# Altium PCB LV1.PCBDOC (part 1 of 2)
Units mm, origin at the board's own origin, x right, y up, seen from the top; angles counter-clockwise.
Board outline 220.06 x 100 mm, 4 copper layers (Component Side, Signal Layer 1, Signal Layer 2, Bottom Layer), stack 0.905 mm thick; 187 components, 117 nets, 633 pads, 195 vias.
Unrouted connection lines stored in the file: 13.
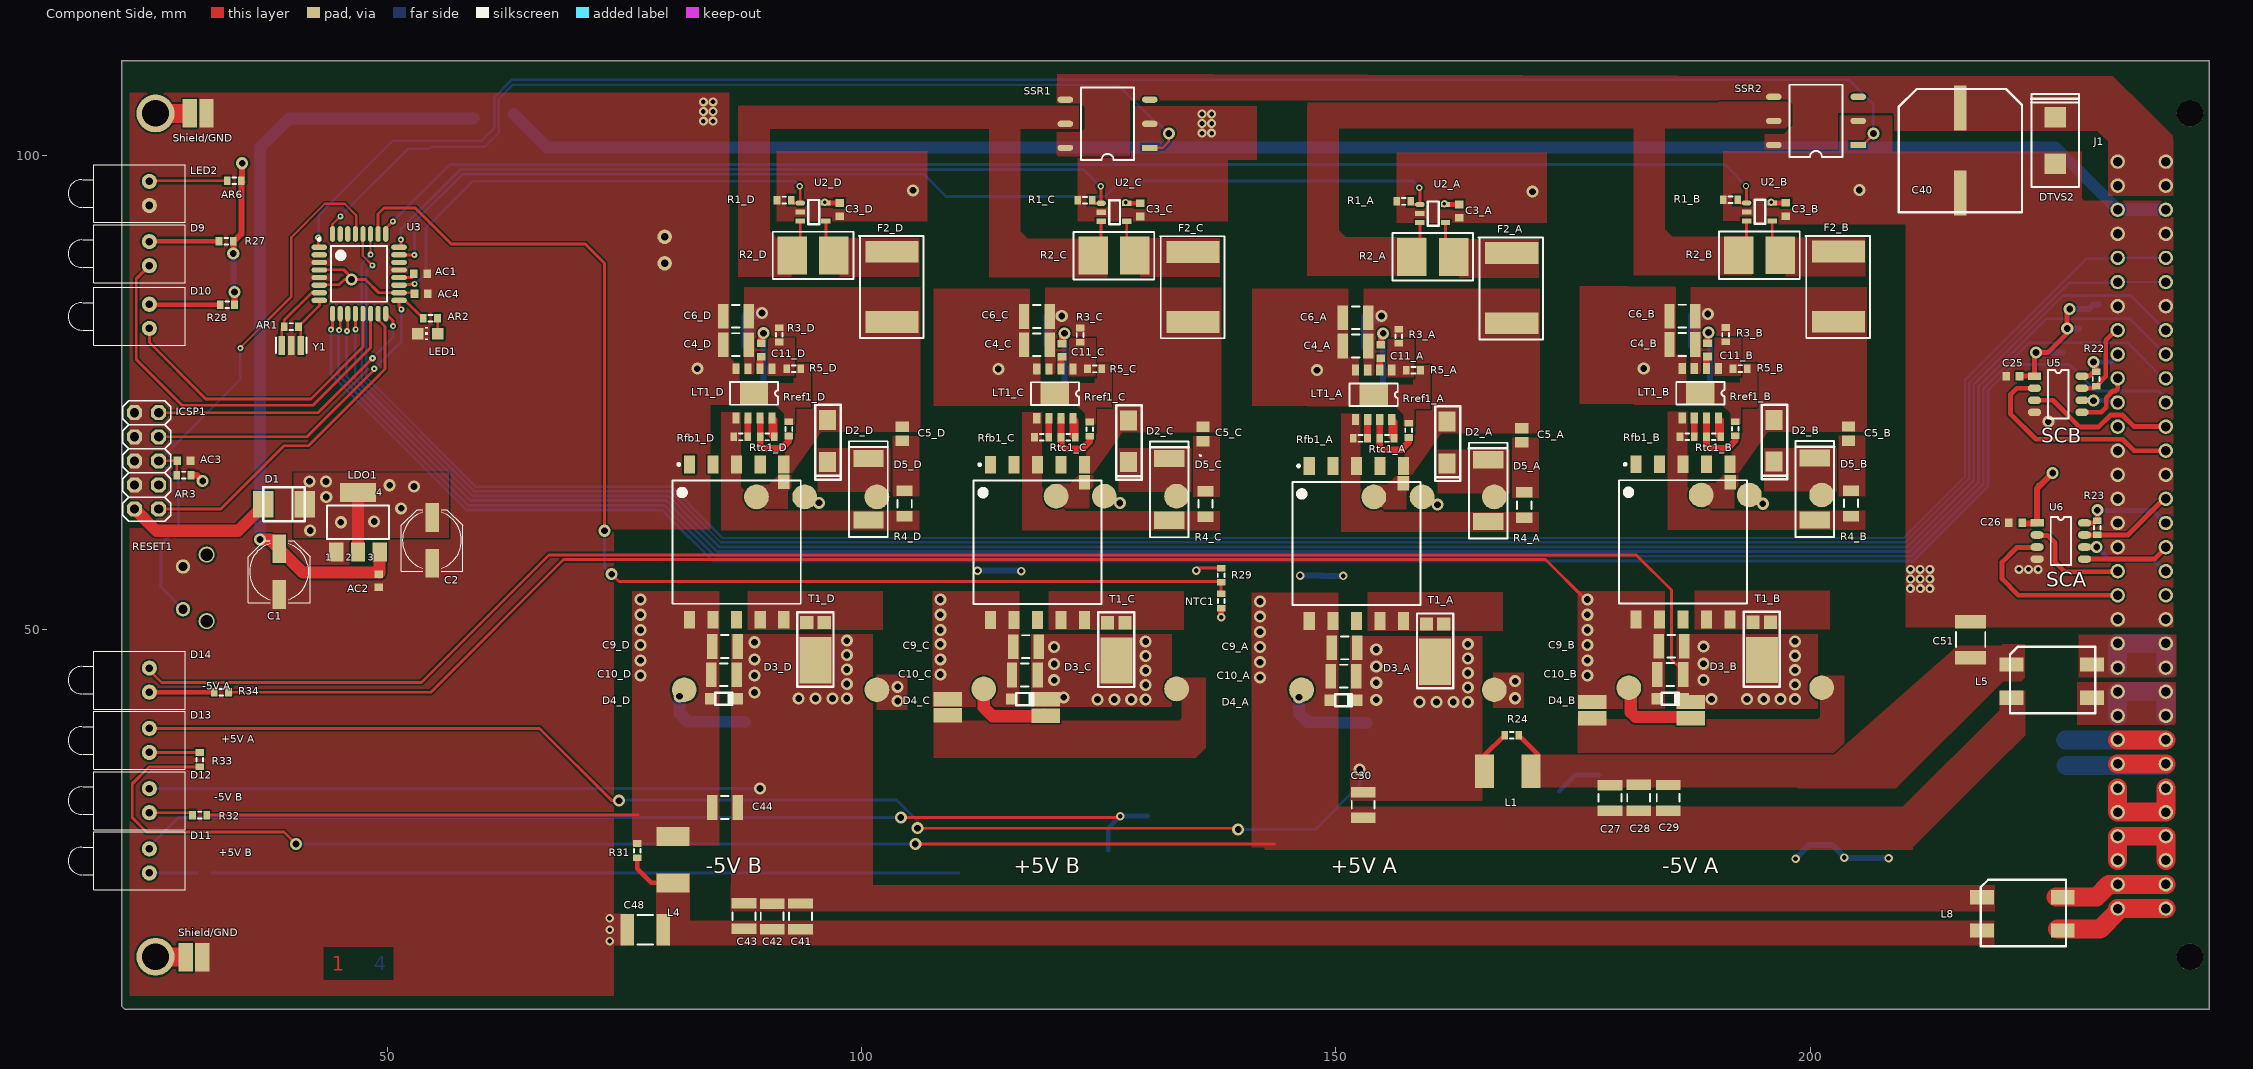
[diagram p0: Component Side view]
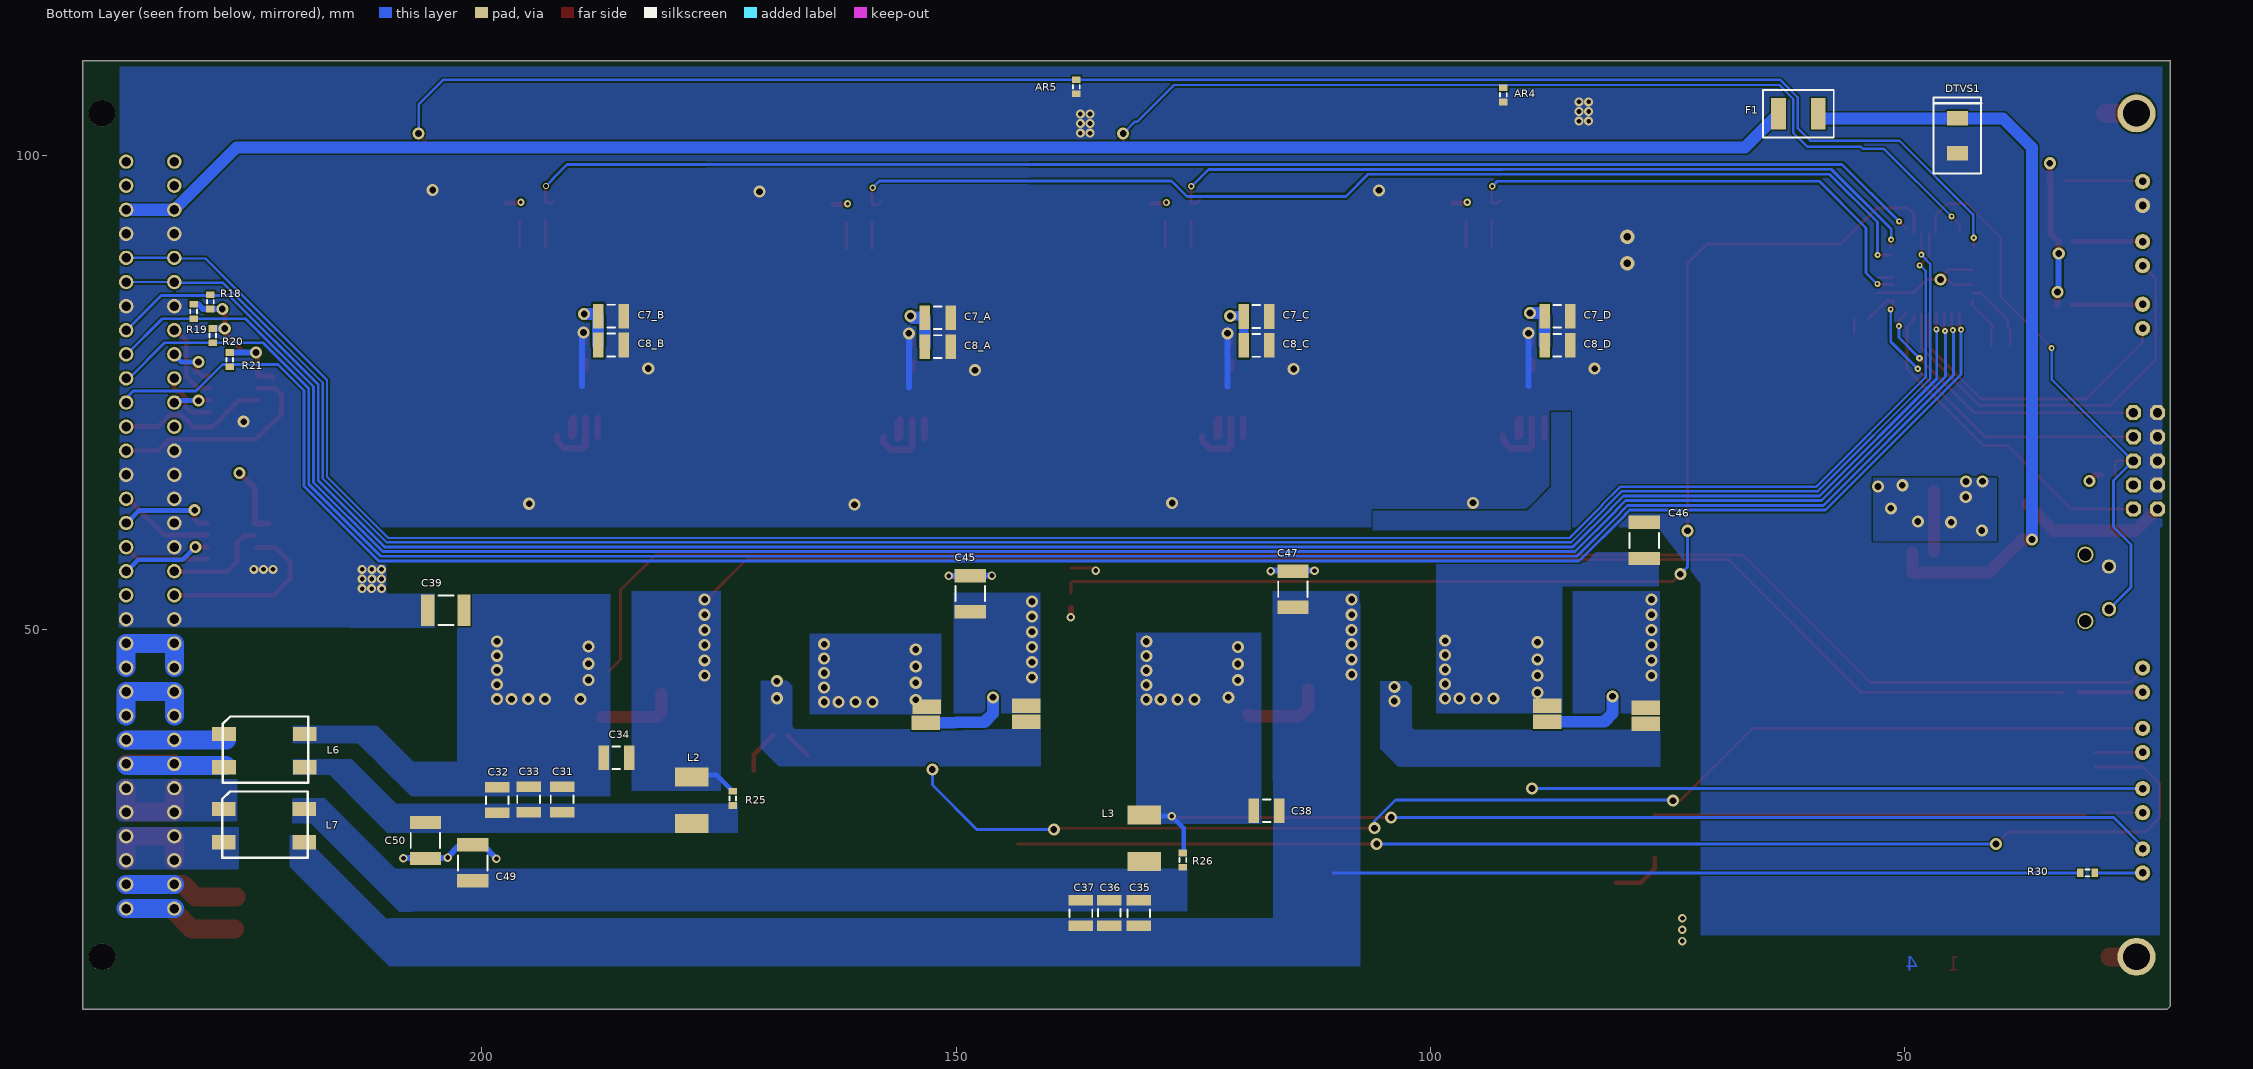
[diagram p1: Bottom Layer view, seen from below]
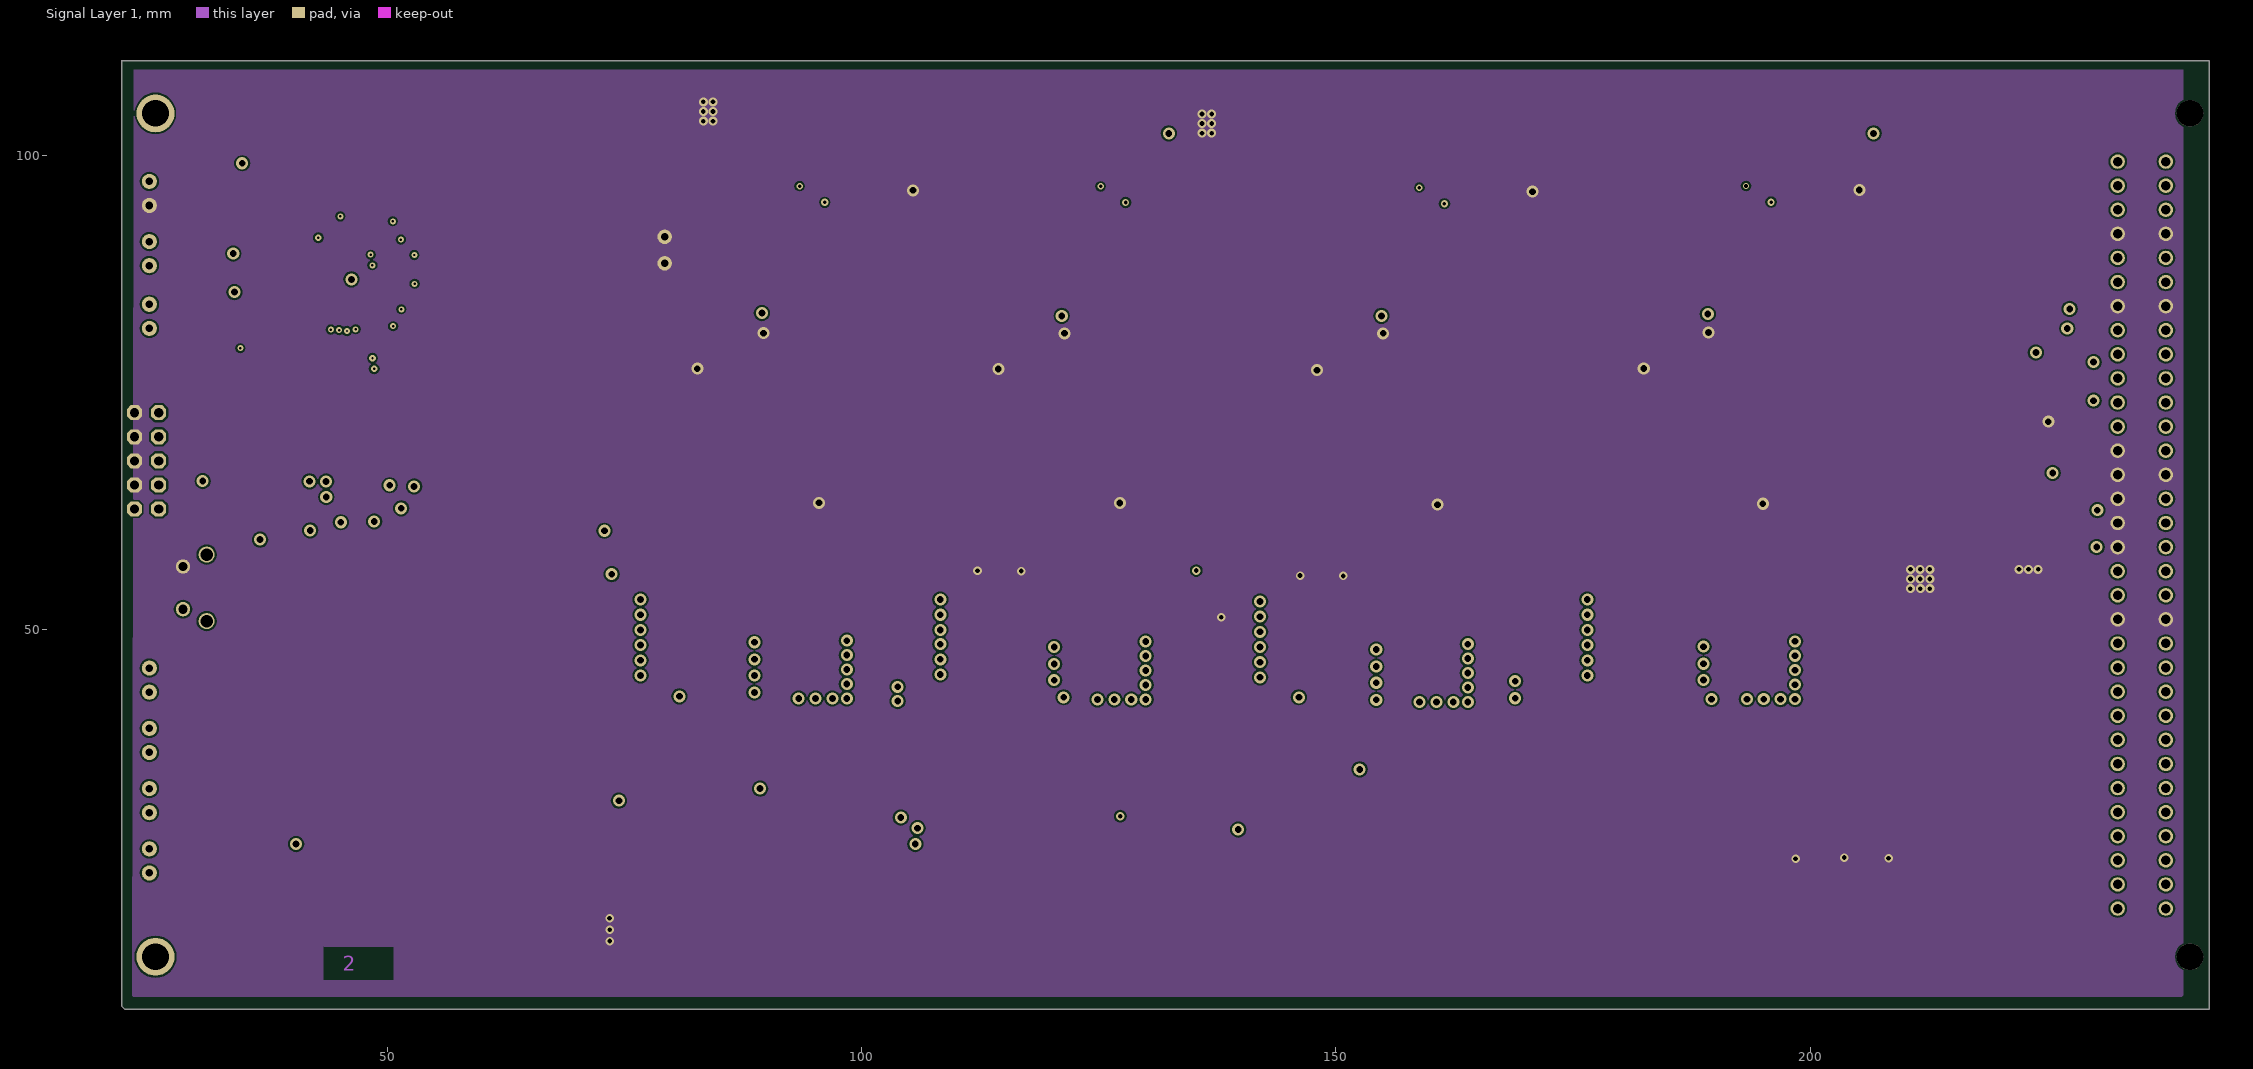
[diagram p2: Signal Layer 1]
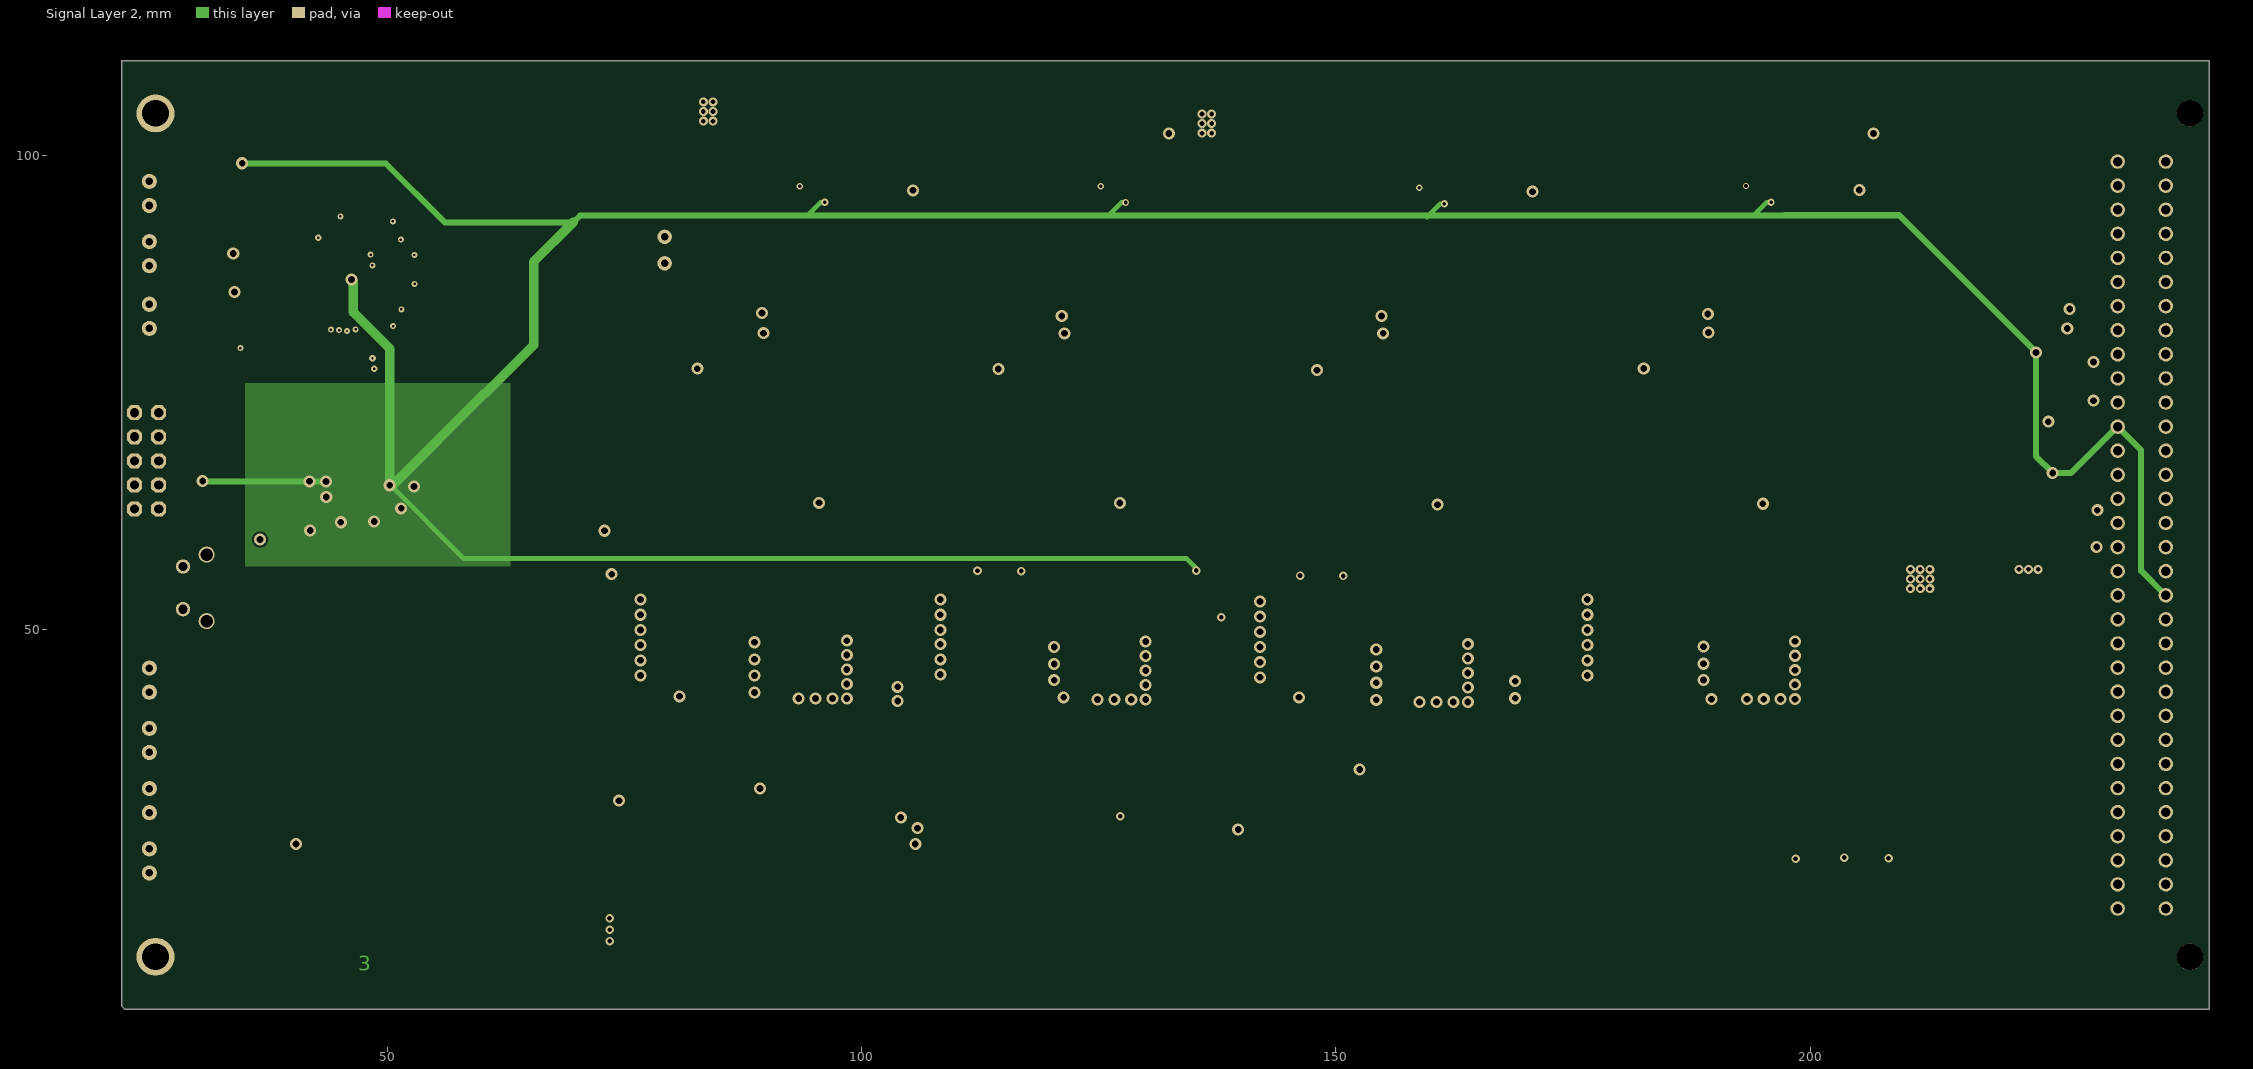
[diagram p3: Signal Layer 2]

## Layer stack, top to bottom
Top Solder: solder mask 0.0102, Solder Resist, Dk 3.5
Component Side: signal copper 0.0356
Dielectric 1: core 0.254, FR-4, Dk 4.2
Signal Layer 1: signal copper 0.036
Dielectric 3: core 0.254, Dk 4.2
Signal Layer 2: signal copper 0.036
Dielectric 4: core 0.254, Dk 4.2
Bottom Layer: signal copper 0.0356
Solder Side: solder mask 0.0102, Solder Resist, Dk 3.5

## Board outline
242.062,110 22.018,110 22,109.982 22,10.414 22,10.352 22.352,10 242.062,10

## Design rules (kind name [scope] priority, off if disabled: settings)
Clearance [InNamedPolygon('GNDtop')] p1: gap=0.2 ignorepadtopadclearanceinfootprint=FALSE except(0: Arc-Hole Track-Hole SMDPad-Hole THPad-Hole Via-Hole Fill-Hole Poly-Hole Region-Hole Text-Hole)
Clearance Clearance_2 [InNamedPolygon('GNDbottom')] p2: gap=0.2 ignorepadtopadclearanceinfootprint=FALSE except(0: Arc-Hole Track-Hole SMDPad-Hole THPad-Hole Via-Hole Fill-Hole Poly-Hole Region-Hole Text-Hole)
Clearance Clearance_1 [All] p3: gap=0.2 ignorepadtopadclearanceinfootprint=FALSE except(0: Arc-Hole Track-Hole SMDPad-Hole THPad-Hole Via-Hole Fill-Hole Poly-Hole Region-Hole Text-Hole)
FabricationTestPointUsage TestPointUsage [All] p1: valid=0 allowmultiple=FALSE
FabricationTestpoint Testpoint [All] p1: side=3 testpointundercomponent=TRUE minsize=1.016 maxsize=2.54 preferedsize=1.524 minholesize=0.508 maxholesize=1.016 preferedholesize=0.813 testpointgrid=0.025 allowsidetop=TRUE allowsidebottom=TRUE usegrid=TRUE gridtolerance=0
PlaneClearance [All] p1: clearance=0.254
PlaneConnect [InNet('GND')] p1: planeconnectstyle=Direct reliefexpansion=0.508 reliefentries=4 reliefconductorwidth=0.254 reliefairgap=0.254
PlaneConnect PlaneConnect_1 [All] p2: planeconnectstyle=Relief reliefexpansion=0.508 reliefentries=4 reliefconductorwidth=0.254 reliefairgap=0.254
PolygonConnect [All] p1: connectstyle=Direct reliefconductorwidth=0.254 reliefentries=4 polygonreliefangle="90 Angle" airgapwidth=0.254
RoomDefinition U_controller [InComponentClass('U_controller')] p1: confinementstyle=ConfineIn formatcopy=TRUE lockcomponents=FALSE outline 93.98,48.768 93.98,110.998 13.716,110.998 13.716,48.768
RoutingVias [All] p1: holewidth=0.254 width=0.508 viastyle="Through Hole" minholewidth=0.254 minwidth=0.508 maxholewidth=0.711 maxwidth=1.27
SilkToSolderMaskClearance SilkscreenOverComponentPads [IsPad] p1: minsilkscreentomaskgap=0.254 clearancetoexposedcopper=TRUE
SolderMaskExpansion [All] p1: expansion=0.051
Width Width_1 [InNet('ISENSE_2') OR InNet('ISENSE_1') OR InNet('NEGISENSE_2') OR InNet('NEGISENSE_1') OR InNet('L_OUT+') OR InNet('L_OUT-') OR InNet('NEGL_OUT+') OR InNet('NEGL_OUT-') OR InNet('SW')] p1: maxlimit=2 minlimit=0.254 preferedwidth=1 midlayer1_maxwidth=0.254 midlayer1_prefwidth=0.254 minimp=50.000000 maximp=50.000000 favimp=50.000000
Width [All] p2: maxlimit=2 minlimit=0.254 preferedwidth=0.254 minimp=50.000000 maximp=50.000000 favimp=50.000000
25 further rules are at their usual default settings.

## Classes and differential pairs
net class ADRS[0..3]: ADRS0 ADRS1 ADRS2 ADRS3
component class Top: *1 C22 C25 C26 C27 C28 C29 C30 C31 C32 C33 C34 C35 C36 C37 C38 C39 C40 C41 C42 C43 C44 C45 C46 C47 C48 C49 C50 C51 C52 C53 C54 C55 C56 C57 C58 C59 C62 C69 D9 D10 D11 D12 D13 D14 DTVS2 J1 L1 L2 L3 L4 L5 L6 L7 L8 NTC1 R18 R19 R20 R21 R22 R23 R24 R25 R26 R27 R28 R29 R30 R31 R32 R33 R34 R_LED3 R_NTC1 RADRS4 SSR1 SSR2 U5 U6 U7 U8
channel class LV1: A B C D
component class A: C3_A C4_A C5_A C6_A C7_A C8_A C9_A C10_A C11_A C67 C68 D2_A D3_A D4_A D5_A D7 D8 F2_A LT1 LT1_A R1_A R2_A R3 R3_A R4 R4_A R5_A R7 Rfb1 Rfb1_A Rref1 Rref1_A Rsense1 Rsense2 Rtc1 Rtc1_A T1 T1_A U2_A
component class D: C3_D C4_D C5_D C6_D C7_D C8_D C9_D C10_D C11_D C60 C61 D2_D D3_D D4_D D5_D D15 D16 D17 D18 D19 D20 D21 F2_D F4 LT1_D LT2 Q4 R1_D R2_D R3_D R4_D R5_D R8 R17 Rfb1_D Rfb2 Rref1_D Rref2 Rsense3 Rsense4 Rtc1_D Rtc2 T1_D T3 T4 U2_D
component class U_controller: AC1 AC2 AC3 AC4 AR1 AR2 AR3 AR4 AR5 AR6 C1 C2 D1 D7 DTVS1 F1 F4 F5 ICSP1 LDO1 LED1 LED2 R_pu1 R_pu3 RESET1 RLED1 U3 U7 U9 Y1
component class B: C3_B C4_B C5_B C6_B C7_B C8_B C9_B C10_B C11_B D2_B D3_B D4_B D5_B F2_B LT1_B R1_B R2_B R3_B R4_B R5_B Rfb1_B Rref1_B Rtc1_B T1_B U2_B
component class C: C3_C C4_C C5_C C6_C C7_C C8_C C9_C C10_C C11_C D2_C D3_C D4_C D5_C F2_C LT1_C R1_C R2_C R3_C R4_C R5_C Rfb1_C Rref1_C Rtc1_C T1_C U2_C

## Components (designator, comment, footprint, x,y, rotation, side; value= is the part's Value field where it differs from the comment)
AC1 "Cap Semi" 1608[0603] 53.5,87.52 r180 top value=0.1uF
AC2 "Cap Semi" 1608[0603] 49.09,55.19 r90 top value=0.1uF
AC3 "Cap Semi" 1608[0603] 28.56,67.85 r0 top value=0.1uF
AC4 "Cap Semi" 1608[0603] 53.57,85.45 r180 top value=0.1uF
AR1 "" J1-0603 39.89,81.98 r0 top value=1M
AR2 "" J1-0603 54.55,82.85 r180 top value=1K
AR3 "pullup" J1-0603 28.56,66.32 r0 top value=10k
AR4 "" J1-0603 92.304,106.401 r90 bottom value=4.7K
AR5 "" J1-0603 137.31,107.26 r90 bottom value=4.7K
AR6 "" J1-0603 33.87,97.344 r180 top value=1k
C1 "" PANASONIC_D 38.608,56.134 r90 top value=47uF
C2 "" PANASONIC_D 54.72,59.44 r90 top value=47uF
C3_A "Cap Semi" 1608[0603] 162.996,94.148 r90 top value=0.1uF (schematic designator C3)
C3_B "Cap Semi" 1608[0603] 197.436,94.318 r90 top value=0.1uF (schematic designator C3)
C3_C "Cap Semi" 1608[0603] 129.396,94.278 r90 top value=0.1uF (schematic designator C3)
C3_D "Cap Semi" 1608[0603] 97.676,94.298 r90 top value=0.1uF (schematic designator C3)
C4_A "Cap Semi" C1210 152.074,79.924 r0 top value=10uF (schematic designator C4)
C4_B "Cap Semi" C1210 186.514,80.094 r0 top value=10uF (schematic designator C4)
C4_C "Cap Semi" C1210 118.474,80.054 r0 top value=10uF (schematic designator C4)
C4_D "Cap Semi" C1210 86.754,80.074 r0 top value=10uF (schematic designator C4)
C5_A "Cap Semi" C0805 169.6,70.526 r90 top value=470p (schematic designator C5)
C5_B "Cap Semi" C0805 204.04,70.696 r90 top value=470p (schematic designator C5)
C5_C "Cap Semi" C0805 136,70.656 r90 top value=470p (schematic designator C5)
C5_D "Cap Semi" C0805 104.28,70.676 r90 top value=470p (schematic designator C5)
C6_A "Cap Semi" C1210 152.074,82.908 r0 top value=2.2uF (schematic designator C6)
C6_B "Cap Semi" C1210 186.514,83.078 r0 top value=2.2uF (schematic designator C6)
C6_C "Cap Semi" C1210 118.474,83.038 r0 top value=2.2uF (schematic designator C6)
C6_D "Cap Semi" C1210 86.754,83.058 r0 top value=2.2uF (schematic designator C6)
C7_A "Cap Semi" C1210 151.934,82.908 r0 bottom value=2.2uF (schematic designator C7)
C7_B "Cap Semi" C1210 186.374,83.078 r0 bottom value=2.2uF (schematic designator C7)
C7_C "Cap Semi" C1210 118.334,83.038 r0 bottom value=2.2uF (schematic designator C7)
C7_D "Cap Semi" C1210 86.614,83.058 r0 bottom value=2.2uF (schematic designator C7)
C8_A "Cap Semi" C1210 151.934,79.86 r0 bottom value=2.2uF (schematic designator C8)
C8_B "Cap Semi" C1210 186.374,80.03 r0 bottom value=2.2uF (schematic designator C8)
C8_C "Cap Semi" C1210 118.334,79.99 r0 bottom value=2.2uF (schematic designator C8)
C8_D "Cap Semi" C1210 86.614,80.01 r0 bottom value=2.2uF (schematic designator C8)
C9_A "Cap Semi" C1210 150.918,48.11 r0 top value=100uF (schematic designator C9)
C9_B "Cap Semi" C1210 185.358,48.28 r0 top value=100uF (schematic designator C9)
C9_C "Cap Semi" C1210 117.318,48.24 r0 top value=100uF (schematic designator C9)
C9_D "Cap Semi" C1210 85.598,48.26 r0 top value=100uF (schematic designator C9)
C10_A "Cap Semi" C1210 150.804,45.126 r0 top value=100uF (schematic designator C10)
C10_B "Cap Semi" C1210 185.244,45.296 r0 top value=100uF (schematic designator C10)
C10_C "Cap Semi" C1210 117.204,45.256 r0 top value=100uF (schematic designator C10)
C10_D "Cap Semi" C1210 85.484,45.276 r0 top value=100uF (schematic designator C10)
C11_A "Cap Semi" 1608[0603] 154.728,79.352 r90 top value=1uF (schematic designator C11)
C11_B "Cap Semi" 1608[0603] 189.168,79.522 r90 top value=1uF (schematic designator C11)
C11_C "Cap Semi" 1608[0603] 121.128,79.482 r90 top value=1uF (schematic designator C11)
C11_D "Cap Semi" 1608[0603] 89.408,79.502 r90 top value=1uF (schematic designator C11)
C25 "Cap Semi" 1608[0603] 221.354,76.749 r0 top value=0.1uF
C26 "Cap Semi" 1608[0603] 221.628,61.278 r0 top value=0.1uF
C27 "Cap Semi" C1210 178.9,32.29 r90 top value=100uF
C28 "Cap Semi" C1210 181.91,32.31 r90 top value=100uF
C29 "Cap Semi" C1210 185.02,32.3 r90 top value=100uF
C30 "Cap Semi" C1210 152.87,31.55 r90 top value=100uF
C31 "Cap Semi" C1210 191.53,32.14 r270 bottom value=100uF
C32 "Cap Semi" C1210 198.36,32.06 r270 bottom value=100uF
C33 "Cap Semi" C1210 195.06,32.14 r270 bottom value=100uF
C34 "Cap Semi" C1210 185.81,36.52 r180 bottom value=100uF
C35 "Cap Semi" C1210 130.74,20.15 r270 bottom value=100uF
C36 "Cap Semi" C1210 133.85,20.17 r270 bottom value=100uF
C37 "Cap Semi" C1210 136.85,20.15 r270 bottom value=100uF
C38 "Cap Semi" C1210 117.27,30.94 r180 bottom value=100uF
C39 "Cap Semi" 1812 203.78,52.08 r180 bottom value=4.7nF
C40 "" EMVY101ARA101MKE0S 215.82,100.52 r90 top value=100uF
C41 "Cap Semi" C1210 93.57,19.81 r90 top value=100uF
C42 "Cap Semi" C1210 90.57,19.8 r90 top value=100uF
C43 "Cap Semi" C1210 87.6,19.83 r90 top value=100uF
C44 "Cap Semi" C1210 85.59,31.28 r0 top value=100uF
C45 "Cap Semi" 1812 148.5,53.82 r270 bottom value=4.7nF
C46 "Cap Semi" 1812 77.47,59.436 r270 bottom value=4.7nF
C47 "Cap Semi" 1812 114.49,54.29 r270 bottom value=4.7nF
C48 "Cap Semi" 1812 77.2,18.4 r0 top value=4.7nF
C49 "Cap Semi" 1812 200.94,25.45 r90 bottom value=4.7nF
C50 "Cap Semi" 1812 205.93,27.81 r90 bottom value=4.7nF
C51 "Cap Semi" 1812 216.9,48.97 r90 top value=4.7nF
D1 "MBRS130LT3G" SMB-403A 39.116,63.246 r180 top
D2_A "SMAJ30A" DO-214AC 161.726,69.764 r90 top (schematic designator D2)
D2_B "SMAJ30A" DO-214AC 196.166,69.934 r90 top (schematic designator D2)
D2_C "SMAJ30A" DO-214AC 128.126,69.894 r90 top (schematic designator D2)
D2_D "SMAJ30A" DO-214AC 96.406,69.914 r90 top (schematic designator D2)
D3_A "PDS1040L" PDS1040L 160.456,46.65 r180 top (schematic designator D3)
D3_B "PDS1040L" PDS1040L 194.896,46.82 r180 top (schematic designator D3)
D3_C "PDS1040L" PDS1040L 126.856,46.78 r180 top (schematic designator D3)
D3_D "PDS1040L" PDS1040L 95.136,46.8 r180 top (schematic designator D3)
D4_A "BZT52H-B5V6" SOD123F 150.804,42.586 r180 top (schematic designator D4)
D4_B "BZT52H-B5V6" SOD123F 185.244,42.756 r180 top (schematic designator D4)
D4_C "BZT52H-B5V6" SOD123F 117.204,42.716 r180 top (schematic designator D4)
D4_D "BZT52H-B5V6" SOD123F 85.484,42.736 r180 top (schematic designator D4)
D5_A "ES3B" DO-214AB 166.044,64.684 r270 top (schematic designator D5)
D5_B "ES3B" DO-214AB 200.484,64.854 r270 top (schematic designator D5)
D5_C "ES3B" DO-214AB 132.444,64.814 r270 top (schematic designator D5)
D5_D "ES3B" DO-214AB 100.724,64.834 r270 top (schematic designator D5)
D9 "LEDYELLOW" LEDYELLOW 24.924,89.662 r180 top
D10 "LEDYELLOW" LEDYELLOW 24.924,83.058 r180 top
D11 "LEDGREEN" LEDGREEN 24.924,25.654 r180 top
D12 "LEDGREEN" LEDGREEN 24.924,32.004 r180 top
D13 "LEDGREEN" LEDGREEN 24.924,38.354 r180 top
D14 "LEDGREEN" LEDGREEN 24.924,44.704 r180 top
DTVS1 "SMBJ10CA" DO-214AA 44.45,102.108 r270 bottom
DTVS2 "SMBJ48A" SMBJ 225.81,101.6 r270 top
F1 "MINISMDC050F-2" MF-MSMF1 61.214,104.394 r180 bottom
F2_A "" MC33192 168.538,86.02 r270 top (schematic designator F2)
F2_B "" MC33192 202.978,86.19 r270 top (schematic designator F2)
F2_C "" MC33192 134.938,86.15 r270 top (schematic designator F2)
F2_D "" MC33192 103.218,86.17 r270 top (schematic designator F2)
ICSP1 "5x2 M" 2X05 24.638,67.818 r90 top
J1 "DIN41612_64WAY" "09 03 164 6919" 234.95,60 r270 top
L1 "Inductor" MPLC0730 168.1,35.1 r0 top value=1uH
L2 "Inductor" MPLC0730 177.86,32.05 r270 bottom value=1uH
L3 "Inductor" MPLC0730 130.16,28.05 r270 bottom value=1uH
L4 "Inductor" MPLC0730 80.12,25.78 r270 top value=1uH
L5 "TDK_CHOKE" ACMV_TDK 225.46,44.61 r0 top
L6 "TDK_CHOKE" ACMV_TDK 222.91,37.27 r180 bottom
L7 "TDK_CHOKE" ACMV_TDK 222.95,29.37 r180 bottom
L8 "TDK_CHOKE" ACMV_TDK 222.36,20.07 r0 top
LDO1 "LDO_5V" SOT223 46.92,61.35 r0 top
LED1 "GREEN" CHIP-LED0805 54.28,81.23 r90 top
LED2 "LEDRED" LEDRED 24.924,96.012 r180 top
LT1_A "LT8302" S8E 155.884,77.384 r270 top (schematic designator LT1)
LT1_B "LT8302" S8E 190.324,77.554 r270 top (schematic designator LT1)
LT1_C "LT8302" S8E 122.284,77.514 r270 top (schematic designator LT1)
LT1_D "LT8302" S8E 90.564,77.534 r270 top (schematic designator LT1)
NTC1 "" J1-0603 137.91,53.05 r90 top value=10K
R1_A "Res3" J1-0603 157.154,95.164 r0 top value=100k (schematic designator R1)
R1_B "Res3" J1-0603 191.594,95.334 r0 top value=100k (schematic designator R1)
R1_C "Res3" J1-0603 123.554,95.294 r0 top value=100k (schematic designator R1)
R1_D "Res3" J1-0603 91.834,95.314 r0 top value=100k (schematic designator R1)
R2_A "Rsense" R6432 160.202,89.322 r0 top value=50m (schematic designator R2)
R2_B "Rsense" R6432 194.642,89.492 r0 top value=50m (schematic designator R2)
R2_C "Rsense" R6432 126.602,89.452 r0 top value=50m (schematic designator R2)
R2_D "Rsense" R6432 94.882,89.472 r0 top value=50m (schematic designator R2)
R3_A "Res3" J1-0603 156.633,80.952 r90 top value=390k (schematic designator R3)
R3_B "Res3" J1-0603 191.073,81.122 r90 top value=390k (schematic designator R3)
R3_C "Res3" J1-0603 123.033,81.082 r90 top value=390k (schematic designator R3)
R3_D "Res3" J1-0603 91.313,81.102 r90 top value=390k (schematic designator R3)
R4_A "Res3" C1206 169.854,63.16 r90 top value=100R (schematic designator R4)
R4_B "Res3" C1206 204.294,63.33 r90 top value=100R (schematic designator R4)
R4_C "Res3" C1206 136.254,63.29 r90 top value=100R (schematic designator R4)
R4_D "Res3" C1206 104.534,63.31 r90 top value=100R (schematic designator R4)
R5_A "Res3" J1-0603 158.17,77.384 r180 top value=15k (schematic designator R5)
R5_B "Res3" J1-0603 192.61,77.554 r180 top value=15k (schematic designator R5)
R5_C "Res3" J1-0603 124.57,77.514 r180 top value=15k (schematic designator R5)
R5_D "Res3" J1-0603 92.85,77.534 r180 top value=15k (schematic designator R5)
R18 "Res3" J1-0603 228.6,84.582 r90 bottom value=47k
R19 "Res3" J1-0603 230.378,83.566 r270 bottom value=47k
R20 "Res3" J1-0603 228.346,81.026 r270 bottom value=47k
R21 "Res3" J1-0603 226.568,78.486 r270 bottom value=47k
R22 "" J1-0603 230.124,76.454 r270 top value=50R
R23 "" J1-0603 230.264,60.77 r90 top value=50R
R24 "Res3" J1-0603 168.53,38.91 r180 top value=1R
R25 "Res3" J1-0603 173.55,32.24 r270 bottom value=1R
R26 "Res3" J1-0603 126.09,25.74 r270 bottom value=1R
R27 "Res3" J1-0603 33.02,90.983 r0 top value=500R
R28 "Res3" J1-0603 33.147,84.277 r0 top value=500R
R29 "" J1-0603 137.89,55.76 r90 top value=10K
R30 "Res3" J1-0603 30.734,24.384 r0 bottom value=500R
R31 "Res3" J1-0603 76.36,26.73 r90 top value=1R
R32 "Res3" J1-0603 30.226,30.48 r0 top value=500R
R33 "Res3" J1-0603 30.226,36.322 r270 top value=500R
R34 "Res3" J1-0603 32.512,43.434 r0 top value=500R
RESET1 "PB_RST" 1-1825027-4 29.718,54.436 r270 top
Rfb1_A "Res3" J1-0603 152.582,70.189 r180 top value=200k (schematic designator Rfb1)
Rfb1_B "Res3" J1-0603 187.022,70.359 r180 top value=200k (schematic designator Rfb1)
Rfb1_C "Res3" J1-0603 118.982,70.319 r180 top value=200k (schematic designator Rfb1)
Rfb1_D "Res3" J1-0603 87.262,70.339 r180 top value=200k (schematic designator Rfb1)
Rref1_A "Res3" J1-0603 157.662,71.034 r90 top value=10K (schematic designator Rref1)
Rref1_B "Res3" J1-0603 192.102,71.204 r90 top value=10K (schematic designator Rref1)
Rref1_C "Res3" J1-0603 124.062,71.164 r90 top value=10K (schematic designator Rref1)
Rref1_D "Res3" J1-0603 92.342,71.184 r90 top value=10K (schematic designator Rref1)
Rtc1_A "Res3" J1-0603 155.376,70.189 r180 top value=169k (schematic designator Rtc1)
Rtc1_B "Res3" J1-0603 189.816,70.359 r180 top value=169k (schematic designator Rtc1)
Rtc1_C "Res3" J1-0603 121.776,70.319 r180 top value=169k (schematic designator Rtc1)
Rtc1_D "Res3" J1-0603 90.056,70.339 r180 top value=169k (schematic designator Rtc1)
SSR1 "LCA701" LCA701S 130.378,100.813 r180 top
SSR2 "LCA701" LCA701S 205.054,101.117 r180 top
T1_A "36V" EP13 152.154,59.108 r90 top (schematic designator T1)
T1_B "36V" EP13 186.594,59.278 r90 top (schematic designator T1)
T1_C "36V" EP13 118.554,59.238 r90 top (schematic designator T1)
T1_D "36V" EP13 86.834,59.258 r90 top (schematic designator T1)
U2_A "INA138" SOT-23 160.202,93.894 r270 top (schematic designator U2)
U2_B "INA138" SOT-23 194.642,94.064 r270 top (schematic designator U2)
U2_C "INA138" SOT-23 126.602,94.024 r270 top (schematic designator U2)
U2_D "INA138" SOT-23 94.882,94.044 r270 top (schematic designator U2)
U3 "ATmega328P-AU" 32A_N 47.04,87.54 r0 top
U5 "ADM4855ARZ" SOICN8 223.64,76.749 r0 top
U6 "ADM4855ARZ" SOICN8 223.914,61.278 r0 top
Y1 "" RESONATOR 39.89,80 r180 top

## Footprints (in the part's own frame and the unit in brackets; to place one, negate y for a bottom-side part, rotate by r counter-clockwise, add the part's x,y. Pads: shape width x height; smd on the part's side, far side on the other; paste and mask are expansions set on the pad)
1-1825027-4 [mm]
  round 1.7 hole 1.3: 0(-3.505,1.245) 0(3.505,1.245)
  round 1.524 hole 0.99: 1(-2.25,-1.245) 2(2.25,-1.245)
  body extent -4.2,-7.37 4.2,2.78, height 7
2X05 [mil]
  oct 62x62 hole 38: 1(-200,-50) 2(-200,50) 3(-100,-50) 4(-100,50) 5(0,-50) 6(0,50) 7(100,-50) 8(100,50) 9(200,-50) 10(200,50)
  silkscreen extent -250,-100 250,100
"09 03 164 6919" [mil]
  round 110.24 hole 110.24: 0(-1750,200) 0(1750,200)
  round 60 hole 39.37: 0(-1550,100) 1(-1450,100) 2(-1350,100) 3(-1250,100) 4(-1150,100) 5(-1050,100) 6(-950,100) 7(-850,100) 8(-750,100) 9(-650,100) 10(-550,100) 11(-450,100) 12(-350,100) 13(-250,100) 14(-150,100) 15(-50,100) 16(50,100) 17(150,100) 18(250,100) 19(350,100) 20(450,100) 21(550,100) 22(650,100) 23(750,100) 24(850,100) 25(950,100) 26(1050,100) 27(1150,100) 28(1250,100) 29(1350,100) 30(1450,100) 31(1550,100) 32(-1550,-100) 33(-1450,-100) 34(-1350,-100) 35(-1250,-100) 36(-1150,-100) 37(-1050,-100) 38(-950,-100) 39(-850,-100) 40(-750,-100) 41(-650,-100) 42(-550,-100) 43(-450,-100) 44(-350,-100) 45(-250,-100) 46(-150,-100) 47(-50,-100) 48(50,-100) 49(150,-100) 50(250,-100) 51(350,-100) 52(450,-100) 53(550,-100) 54(650,-100) 55(750,-100) 56(850,-100) 57(950,-100) 58(1050,-100) 59(1150,-100) 60(1250,-100) 61(1350,-100) 62(1450,-100) 63(1550,-100)
  body extent -1850,-100 1851,609, height 368
32A_N [mm] "Thin QFP, 32-Leads, Body 7x7mm, Pitch 0.8mm, IPC Medium Density"
  oval 1.65x0.55 smd: 1(-4.2,2.8) 2(-4.2,2) 3(-4.2,1.2) 4(-4.2,0.4) 5(-4.2,-0.4) 6(-4.2,-1.2) 7(-4.2,-2) 8(-4.2,-2.8) 17(4.2,-2.8) 18(4.2,-2) 19(4.2,-1.2) 20(4.2,-0.4) 21(4.2,0.4) 22(4.2,1.2) 23(4.2,2) 24(4.2,2.8)
  oval 0.55x1.65 smd: 9(-2.8,-4.2) 10(-2,-4.2) 11(-1.2,-4.2) 12(-0.4,-4.2) 13(0.4,-4.2) 14(1.2,-4.2) 15(2,-4.2) 16(2.8,-4.2) 25(2.8,4.2) 26(2,4.2) 27(1.2,4.2) 28(0.4,4.2) 29(-0.4,4.2) 30(-1.2,4.2) 31(-2,4.2) 32(-2.8,4.2)
  silkscreen extent -4.32,-2.95 2.95,3.75, body extent -3.5,-3.5 3.5,3.5, height 1.2
1608[0603] [mm] "Chip Capacitor, Body 1.6x0.8mm, IPC High Density"
  rect 0.8x0.9 smd: 1(-0.7,0) 2(0.7,0)
  body extent -0.87,-0.48 0.87,0.48, height 1.3
1812 [mm] "Chip Capacitor, Body 4.5x3.2mm, IPC High Density"
  rect 1.4x3.3 smd: 1(-1.9,0) 2(1.9,0)
  silkscreen extent -0.8,-1.55 0.8,1.55, body extent -2.4,-1.7 2.4,1.7, height 1.4
ACMV_TDK [mm]
  rect 2.5x1.5 smd: 1(-4.25,1.75) 2(-4.25,-1.75) 3(4.25,-1.75) 4(4.25,1.75)
  silkscreen extent -4.4,-3.4 4.6,3.6, body extent -4.4,-3.4 4.6,3.6, height 2
C0805 [mm] "Chip Capacitor, Body 2.0x1.3mm, IPC High Density"
  rect 1.1x1.4 smd: 1(-0.75,0) 2(0.75,0)
  body extent -1.1,-0.72 1.1,0.72, height 1.4
C1206 [mm] "Chip Capacitor, Body 3.2x1.6mm, IPC High Density"
  rect 1.1x1.7 smd: 1(-1.35,0) 2(1.35,0)
  silkscreen extent -0.4,-0.75 0.4,0.75, body extent -1.7,-0.9 1.7,0.9, height 1.3
C1210 [mm] "Chip Capacitor, Body 3.2x2.5mm, IPC High Density"
  rect 1.1x2.6 smd: 1(-1.35,0) 2(1.35,0)
  silkscreen extent -0.4,-1.2 0.4,1.2, body extent -1.7,-1.35 1.7,1.35, height 1.3
CHIP-LED0805 [mil]
  rect 48x48 smd: A(0,-41.34) C(0,42)
  silkscreen extent -27,0 27,12
DO-214AA [mm]
  rect 1.52x2.18 smd: 1(-1.84,0) 2(1.84,0)
  silkscreen extent -4.01,-2.5 4.01,2.5
DO-214AB [mm]
  rect 1.8x3.2 smd: 1(-3.25,0) 2(3.25,0)
  silkscreen extent -5.05,-2.03 5.05,2.03
DO-214AC [mm]
  rect 2.1x1.8 smd: 1(2.2,0) 2(-2.2,0)
  silkscreen extent -4.06,-1.4 3.81,1.27
EMVY101ARA101MKE0S [mm]
  rect 4.75x1.3 smd: 1(4.475,0) 2(-4.475,0)
  silkscreen extent -6.5,-6.5 6.5,6.5
EP13 [mm] "SMD, 10-Leads, Body 13.5x14.0mm (max), Pitch 2.48mm, IPC Medium Density"
  rect 1.88x1.17 smd: 1(8.18,4.96) 2(8.18,2.48) 3(8.18,0) 4(8.18,-2.48) 5(8.18,-4.96) 6(-8.18,-4.96) 7(-8.18,-2.48) 8(-8.18,0) 9(-8.18,2.48) 10(-8.18,4.96)
  silkscreen extent -6.5,-6.75 8.3,6.75, body extent -8.88,-6.75 8.87,6.75, height 12.5
J1-0603 [mm] "Chip Resistor, Body 1.6x0.8mm, IPC High Density"
  rect 0.7x0.9 smd: 1(-0.75,0) 2(0.75,0)
  silkscreen extent -0.2,-0.35 0.2,0.35, body extent -0.85,-0.48 0.85,0.48, height 0.9
LCA701S [mm]
  rect 1.65x0.65 smd: 1(0,0)
  oval 1.65x0.65 smd: 2(0,-2.54) 3(0,-5.08) 4(8.9,-5.08) 5(8.9,-2.54) 6(8.9,0)
  silkscreen extent 1.66,-6.35 7.24,1.27
LEDGREEN [mm] "LED; 2 Leads"
  round 1.6 hole 0.8: 1(0,1.27) 2(0,-1.27)
  silkscreen extent -3.81,-3.05 8.56,3.05, body extent -3.76,-3.05 8.64,2.92, height 5.97
LEDRED [mm] "LED; 2 Leads"
  round 1.6 hole 0.8: 1(0,1.27) 2(0,-1.27)
  silkscreen extent -3.81,-3.05 8.56,3.05, body extent -3.76,-3.05 8.64,2.92, height 5.97
LEDYELLOW [mm] "LED; 2 Leads"
  round 1.6 hole 0.8: 1(0,1.27) 2(0,-1.27)
  silkscreen extent -3.81,-3.05 8.56,3.05, body extent -3.76,-3.05 8.64,2.92, height 5.97
MC33192 [mm]
  rect 2.3x5.6 smd: 1(-3.7,0) 2(3.7,0)
  silkscreen extent -5.35,-3.5 5.4,3.3, body extent -4.4,-2.8 4.4,2.8, height 0.5
MF-MSMF1 [mm]
  rect 1.55x3.3 smd: 1(-2.1,0) 2(2.1,0)
  silkscreen extent -3.73,-2.5 3.73,2.5
MPLC0730 [mm]
  rect 2x3.5 smd: 1(2.45,0) 2(-2.45,0)
  body extent -3.18,-2.67 3.17,2.79, height 2
PANASONIC_D [mil]
  rect 119x56 smd: 1(95,0) 2(-94.49,0)
  silkscreen extent -128,-128 128,128, body extent -130,-125 125,125, height 236
PDS1040L [mm]
  rect 1.39x1.4 smd: 1(-0.92,-3.982) 1(0.92,-3.982)
  rect 3.36x4.86 smd: 2(0,0)
  silkscreen extent -1.9,-5.08 1.91,2.79, body extent -1.52,-4.06 1.52,2.29, height 1
R6432 [mm]
  rect 3.1x4 smd: 1(-2.2,0) 2(2.2,0)
  silkscreen extent -4.25,-2.5 4.25,2.5, body extent -3.2,-2 3.3,2, height 0.5
RESONATOR [mil]
  rect 28x79 smd: 1(-39.37,0) 2(0,0) 3(40,0)
  silkscreen extent -63,-31 63,32
S8E [mil]
  rect 45x30 smd: 1(0,0) 2(0,-50) 3(0,-100) 4(0,-150) 5(205,-150) 6(205,-100) 7(205,-50) 8(205,0)
  rect 89x118 smd: 4(102.5,-75)
  silkscreen extent 55,-175 149,25
SMB-403A [mm]
  rect 2.159x2.743 smd: 1(-2.21,0) 2(2.21,0)
  silkscreen extent -2.2,-1.8 2.2,1.8, body extent -2.1,-1.9 2.3,1.7, height 2
SMBJ [mm]
  rect 2.16x2.26 smd: 1(-2.45,0) 2(2.45,0)
  silkscreen extent -4.9,-2.5 4.9,2.5, body extent -3.2,-2 3.3,2, height 2
SOD123F [mm]
  rect 1.2x1.2 smd: 1(-1.4,0) 2(1.4,0)
  silkscreen extent -1.02,-0.63 0.89,0.64
SOICN8 [mm]
  rect 1.4x0.8 smd: 1(0,0)
  oval 1.4x0.8 smd: 2(0,-1.27) 3(0,-2.54) 4(0,-3.81) 5(5,-3.81) 6(5,-2.54) 7(5,-1.27) 8(5,0)
  silkscreen extent 1.43,-4.44 3.56,0.64, body extent -0.38,-4.7 5.46,0.89, height 1
SOT223 [mm]
  rect 1.5x2 smd: 1(-2.3,-3.15) 2(0,-3.15) 3(2.3,-3.15)
  rect 3.8x2 smd: 4(0,3.15)
  silkscreen extent -3.28,-1.78 3.28,1.78, body extent -3.3,-4.2 3.3,4.2, height 1
SOT-23 [mm]
  oval 0.55x1 smd: 1(-0.95,-1.35)
  rect 0.55x1 smd: 2(0,-1.35) 3(0.95,-1.35) 4(0.95,1.35) 5(-0.95,1.35)
  silkscreen extent -1.27,-0.51 1.27,0.63

## Part data
AC1 AC2 AC3 AC4 C3_A C3_B C3_C C3_D C25 C26: "Capacitor (Semiconductor SIM Model)", PartNo=CC0603KRX7R9BB104, LatestRevisionDate=29-May-2009, LatestRevisionNote="IPC-7351 Footprint Added.", PackageDescription="Chip Capacitor", PackageReference=C1206, Published=8-Jun-2000, Publisher="Altium Limited"
AR1 AR2 AR3 AR4 AR5 AR6 R22 R23 R29: library part Res3, "Resistor", LatestRevisionDate=29-May-2009, LatestRevisionNote="IPC-7351 Footprint Added.", PackageDescription="Chip Resistor", PackageReference=J1-0603, Published=8-Jun-2000, Publisher="Altium Limited"
C1 C2: library part CPOL-EUD, PartNo=EEE1EA470WAP
C4_A C4_B C4_C C4_D: "Capacitor (Semiconductor SIM Model)", PartNo=GRM32ER61H106KA12L, LatestRevisionDate=29-May-2009, LatestRevisionNote="IPC-7351 Footprint Added.", PackageDescription="Chip Capacitor", PackageReference=C1206, Published=8-Jun-2000, Publisher="Altium Limited"
C5_A C5_B C5_C C5_D: "Capacitor (Semiconductor SIM Model)", PartNo=08055A221JAT2A, Supplier Part Number 1=888-1481, LatestRevisionDate=29-May-2009, LatestRevisionNote="IPC-7351 Footprint Added.", PackageDescription="Chip Capacitor", PackageReference=C1206, Published=8-Jun-2000, Publisher="Altium Limited", Supplier 1=RS-Components
C6_A C6_B C6_C C6_D C7_A C7_B C7_C C7_D C8_A C8_B C8_C C8_D: "Capacitor (Semiconductor SIM Model)", PartNo=C1210C225K1RACTU, Supplier Part Number 1=1793832, LatestRevisionDate=29-May-2009, LatestRevisionNote="IPC-7351 Footprint Added.", PackageDescription="Chip Capacitor", PackageReference=C1206, Published=8-Jun-2000, Publisher="Altium Limited", Supplier 1=Farnell
C9_A C9_B C9_C C9_D C10_A C10_B C10_C C10_D C30 C34 C38 C44: "Capacitor (Semiconductor SIM Model)", PartNo=C3225X5R0J107M250AC, LatestRevisionDate=29-May-2009, LatestRevisionNote="IPC-7351 Footprint Added.", PackageDescription="Chip Capacitor", PackageReference=C1206, Published=8-Jun-2000, Publisher="Altium Limited"
C11_A C11_B C11_C C11_D: "Capacitor (Semiconductor SIM Model)", PartNo=06033D105KAT2A, LatestRevisionDate=29-May-2009, LatestRevisionNote="IPC-7351 Footprint Added.", PackageDescription="Chip Capacitor", PackageReference=C1206, Published=8-Jun-2000, Publisher="Altium Limited"
C27 C28 C29 C31 C32 C33 C35 C36 C37 C41 C42 C43: "Capacitor (Semiconductor SIM Model)", PartNo=CL32A107MPVNNNE, LatestRevisionDate=29-May-2009, LatestRevisionNote="IPC-7351 Footprint Added.", PackageDescription="Chip Capacitor", PackageReference=C1206, Published=8-Jun-2000, Publisher="Altium Limited"
C39 C45 C46 C47 C48 C49 C50 C51: "Capacitor (Semiconductor SIM Model)", PartNo=C1812C472KDRACTU, LatestRevisionDate=29-May-2009, LatestRevisionNote="IPC-7351 Footprint Added.", PackageDescription="Chip Capacitor", PackageReference=C1206, Published=8-Jun-2000, Publisher="Altium Limited"
C40: library part CPOL-EUD, PartNo=EMVY101ARA101MKE0S, Supplier 1=Farnell
D1 D5_A D5_B D5_C D5_D: "Power Diode", ComponentLink1Description="Manufacturer Link", ComponentLink1URL=http://www.infineon.com/, ComponentLink2Description=Datasheet, ComponentLink2URL=http://www.infineon.com/upload/Document/cmc_upload/documents/080/656/bas116series.pdf, DatasheetVersion=Oct-1999, LatestRevisionDate=29-May-2009, LatestRevisionNote="IPC-7351 Footprint Added.", Note="Pin 2 is not connected and not drawn.", PackageDescription="3-Pin SOT-23 Package 0.95 mm Pitch, 2.5 mm Lead Span", PackageReference=SOT-23, PackageVersion=Sep-2001, Published=21-Mar-2003, Publisher="Altium Limited"
  D1: PartNo=MBRS130LT3G
  D5_A D5_B D5_C D5_D: PartNo=ES3B
D2_A D2_B D2_C D2_D: library part "D Zener", "Zener Diode", LatestRevisionDate=17-Jul-2002, LatestRevisionNote="Re-released for DXP Platform.", PackageDescription="Diode, Thru-Hole; 2 Leads; 0.7 in Pin Spacing", PackageReference=DIODE-0.7, PartNo=SMAJ30A, Published=8-Jun-2000, Publisher="Altium Limited"
D3_A D3_B D3_C D3_D: "Schottky Diode", PartNo=SBR15U50SP5-13, Supplier Part Number 1=751-4688, Code_JEDEC=DO-214-AA, LatestRevisionDate=17-Jul-2002, LatestRevisionNote="Re-released for DXP Platform.", PackageReference=SMC, Published=8-Jun-2000, Publisher="Altium Limited", Supplier 1=RS-Components
D4_A D4_B D4_C D4_D: "Zener Diode", LatestRevisionDate=17-Jul-2002, LatestRevisionNote="Re-released for DXP Platform.", PackageDescription="Diode, Thru-Hole; 2 Leads; 0.7 in Pin Spacing", PackageReference=DIODE-0.7, PartNo=BZT52H-B5V6, Published=8-Jun-2000, Publisher="Altium Limited"
D9 D10: PartNo=550-0307F
D11: PartNo=550-0207F, Supplier Part Number 1=890-6921, Supplier 1=RS-Components
D12 D13 D14: PartNo=550-0207F
DTVS1: library part SMBJ, "TVS", ComponentLink1Description="Manufacturer Link", ComponentLink1URL=http://www.infineon.com/, ComponentLink2Description=Datasheet, ComponentLink2URL=http://www.infineon.com/upload/Document/cmc_upload/documents/080/656/bas116series.pdf, DatasheetVersion=Oct-1999, LatestRevisionDate=29-May-2009, LatestRevisionNote="IPC-7351 Footprint Added.", Note="Pin 2 is not connected and not drawn.", PackageDescription="3-Pin SOT-23 Package 0.95 mm Pitch, 2.5 mm Lead Span", PackageReference=SOT-23, PackageVersion=Sep-2001, PartNo=SMBJ10CA, Published=21-Mar-2003, Publisher="Altium Limited"
DTVS2: library part SMBJ, "TVS", PartNo=SMBJ36A, ComponentLink1Description="Manufacturer Link", ComponentLink1URL=http://www.infineon.com/, ComponentLink2Description=Datasheet, ComponentLink2URL=http://www.infineon.com/upload/Document/cmc_upload/documents/080/656/bas116series.pdf, DatasheetVersion=Oct-1999, LatestRevisionDate=29-May-2009, LatestRevisionNote="IPC-7351 Footprint Added.", Note="Pin 2 is not connected and not drawn.", PackageDescription="3-Pin SOT-23 Package 0.95 mm Pitch, 2.5 mm Lead Span", PackageReference=SOT-23, PackageVersion=Sep-2001, Published=21-Mar-2003, Publisher="Altium Limited"
F1: library part "Fuse 1", "Fuse", Tripping current=1A, LatestRevisionDate=17-Jul-2002, LatestRevisionNote="Re-released for DXP Platform.", PackageDescription="Thru-Hole; 2 Leads", PackageReference=PIN-W2/E2.8, PartNo=MINISMDC050F-2, Published=8-Jun-2000, Publisher="Altium Limited"
F2_A F2_B F2_C F2_D: library part "Fuse 1", "Fuse", PartNo=MC33192, Tripping current=1A, LatestRevisionDate=17-Jul-2002, LatestRevisionNote="Re-released for DXP Platform.", PackageDescription="Thru-Hole; 2 Leads", PackageReference=PIN-W2/E2.8, Published=8-Jun-2000, Publisher="Altium Limited"
ICSP1: library part PINHD-2X5, PartNo=2-1761605-3
J1: PartNo="0903 164 6921", Supplier Part Number 1=1096903, Supplier 1=Farnell
L1 L2 L3 L4: PartNo=MPLC0730L1R0, Code_IEC=1005, Code_JEITA=0402, LatestRevisionDate=29-May-2009, LatestRevisionNote="IPC-7351 Footprint Added.", PackageDescription="Chip Inductor", PackageReference=0402-A, Published=8-Jun-2000, Publisher="Altium Limited"
L5 L6 L7 L8: PartNo=ACM90V-701-2PL
LDO1: PartNo=NCP1117ST50T3G
LED1: library part LEDCHIP-LED0805, PartNo=KPT-2012SGC, Supplier Part Number 1=2099239, Supplier 1=Farnell
LED2: PartNo=550-0407F
LT1_A LT1_B LT1_C LT1_D: PartNo=LT8302ES8E#PBF
NTC1: library part Res3, "Resistor", PartNo=NCP18XH103J03RB, LatestRevisionDate=29-May-2009, LatestRevisionNote="IPC-7351 Footprint Added.", PackageDescription="Chip Resistor", PackageReference=J1-0603, Published=8-Jun-2000, Publisher="Altium Limited"
R1_A R1_B R1_C R1_D R3_A R3_B R3_C R3_D R5_A R5_B R5_C R5_D R18 R19 R20 R21 R24 R25 R26 R27 R28 R30 R31 R32 R33 R34 Rfb1_A Rfb1_B Rfb1_C Rfb1_D Rref1_A Rref1_B Rref1_C Rref1_D Rtc1_A Rtc1_B Rtc1_C Rtc1_D: "Resistor", LatestRevisionDate=29-May-2009, LatestRevisionNote="IPC-7351 Footprint Added.", PackageDescription="Chip Resistor", PackageReference=J1-0603, Published=8-Jun-2000, Publisher="Altium Limited"
R2_A R2_B R2_C R2_D: "CRF2512-FV-R001ELF", PartNo=MCS3264R050FER, Supplier Part Number 1=893-3611, LatestRevisionDate=29-May-2009, LatestRevisionNote="IPC-7351 Footprint Added.", PackageDescription="Chip Resistor", PackageReference=J1-0603, Published=8-Jun-2000, Publisher="Altium Limited", Supplier 1=RS-Components
R4_A R4_B R4_C R4_D: "Resistor", PartNo=CRS1206-FX-1000ELF, LatestRevisionDate=29-May-2009, LatestRevisionNote="IPC-7351 Footprint Added.", PackageDescription="Chip Resistor", PackageReference=J1-1206, Published=8-Jun-2000, Publisher="Altium Limited"
RESET1: PartNo=1-1825027-4
SSR1 SSR2: PartNo=LCA701S
T1_A T1_B T1_C T1_D: library part "WE-FB, 750311457", "Flyback Transformer suitable or LT3573/ LT3574/ LT3575/ LT3748 WE-FB, Ui=36V", Manufacturer="Würth Elektronik eiSos GmbH", PartNo=750311457, ComponentLink1Description=Manufacturer, ComponentLink1URL=http://www.we-online.de, ComponentLink2Description=Datasheet, ComponentLink2URL=http://katalog.we-online.de/pbs/datasheet/750311457.pdf, Created by="Otto Christin", Created Date="OCT 2013", Ui=36V
U2_A U2_B U2_C U2_D: PartNo=INA138NA/250
U3: "8-bit AVR Microcontroller, 32KB Flash, 1KB EEPROM, 2KB SRAM, 32-pin TQFP, Industrial Grade (-40°C to 85°C)", Code_JEDEC=MS-026-ABA, ComponentLink1Description="Manufacturer URL", ComponentLink1URL=http://www.atmel.com/, ComponentLink2Description="ATmega48A/48PA/88A/88PA/168A/168PA/328/328P Datasheet", ComponentLink2URL=http://www.atmel.com/dyn/resources/prod_documents/doc8271.pdf, ComponentLink3Description="ATmega48A/48PA/88A/88PA/168A/168PA/328/328P Summary", ComponentLink3URL=http://www.atmel.com/dyn/resources/prod_documents/8271S.pdf, DatasheetVersion="revD, May-2011", PackageDescription="32-Lead, 7x7x1.0 mm Body, 0.8mm Lead Pitch, Thin Profile Plastic Quad Flat Package (TQFP)", PackageReference=32A, PackageVersion="revC, Oct-2010", PartNo=ATmega328P-AU
U5 U6: library part SP3084EEN-L, PartNo=ADM4855ARZ
Y1: library part RESONATORMU, PartNo=CSTCE16M0V53-R0, Supplier Part Number 1=792-6524, Supplier 1=RS-Components

## Free pads (board coordinates)
  round 2.6 smd paste-2.6: 1(88.92,64.02) 1(120.5,64.1) 1(154,64.02) 1(188.5,64.22) 2(94,64.02) 2(125.58,64.1) 2(159.08,64.02) 2(193.58,64.22) 3(81.3,43.7) 3(112.88,43.78) 3(146.38,43.7) 3(180.88,43.9) 5(101.62,43.7) 5(133.2,43.78) 5(166.7,43.7) 5(201.2,43.9) 6(101.62,64.02) 6(133.2,64.1) 6(166.7,64.02) 6(201.2,64.22)
  round 4 hole 2.8: 2(25.57,15.549) 2(25.57,104.444)
  round 1.524 hole 0.762: 3(79.248,91.44) 4(79.248,88.646)
  rect 1.524x3 smd: 7(28.75,15.5) 7(29.2,104.45) 7(30.5,15.5) 7(30.95,104.45)
  rect 3x1.524 smd far side: 7(77.3,40.1) 7(77.3,41.8) 7(87.7,40.3) 7(87.7,42) 7(142.6,40.3) 7(142.6,42) 7(153.1,41.9) 7(153.2,40.2)
  rect 1.2x1.524 smd: 7(91.8,65.6) 7(123.5,65.55) 7(157.1,65.45) 7(191.55,65.55)
  rect 3x1.524 smd: 7(109.1,41) 7(109.1,42.7) 7(119.4,40.95) 7(119.4,42.7) 7(177,40.7) 7(177,42.4) 7(187.4,40.7) 7(187.4,42.4)

## Via types
v1: diameter 1.27, hole 0.711, Component Side to Bottom Layer, 133 vias
v2: diameter 0.95, hole 0.5, Component Side to Bottom Layer, 24 vias
v3: diameter 0.635, hole 0.254, Component Side to Bottom Layer, 14 vias
v4: diameter 0.9, hole 0.5, Component Side to Bottom Layer, 13 vias
v5: diameter 0.762, hole 0.381, Component Side to Bottom Layer, 4 vias
v6: diameter 0.672, hole 0.381, Component Side to Bottom Layer, 4 vias
v7: diameter 0.7, hole 0.254, Component Side to Bottom Layer, 3 vias

## Nets (pads, with @x,y where several pads share a name; then routed paths per layer and width w, separated by ;. In a path a pad name is that pad's centre, name@x,y a point inside that pad or via, vN(x,y) a via of type N, cw(c..) or ccw(c..) an arc to the next point about the centre after c; other vN are vias at no path point)
32V: C40.1 DTVS2.1 J1.0@237.49,99.37 J1.1 J1.32 J1.33 SSR1.4 SSR1.6 SSR2.4 SSR2.6
+5V: AC4.2 AR3.2 AR6.1 C2.1 C3_A.2 C3_B.2 C3_C.2 C3_D.2 C25.2 C26.2 D1.1 J1.18 J1.43 LDO1.2 LDO1.4 R18.1 R19.1 R20.1 R21.1 R27.2 R28.2 R29.2 U2_A.5 U2_B.5 U2_C.5 U2_D.5 U3.4 U3.6 U3.18 U5.1 U6.1 | length 482.8
  Component Side w0.3: U3.4@42.88,87.96 45.42,87.96 46.23,87.15 v1(46.23,86.95) ; U3.6@42.95,86.38 44.91,86.38 45.48,86.95 v1(46.23,86.95) ; U3.18@51.23,85.54 49.11,85.54 47.7,86.95 v1(46.23,86.95) ; v4@135.35,56.51 R29.2@137.89,56.51
  Component Side w0.305: U3.18@51.24,85.54 AC4.2@52.86,85.54
  Component Side w0.5: U2_D.5@96.232,94.994 C3_D.2@97.672,94.994 ; U2_C.5@127.952,94.974 C3_C.2@129.392,94.974 ; U2_A.5@161.552,94.844 C3_A.2@162.992,94.844 ; U2_B.5@195.992,95.014 C3_B.2@197.432,95.014 ; v1(223.786,79.236) 225.032,79.236 227.076,81.28 v1@227.076,83.566
  Component Side w0.508: C25.2@222.054,76.498 C25.2@222.054,76.749 U5.1@223.64,76.749 v1@223.64,79.13 ; 224.028,65.024 224.028,65.278
  Component Side w0.635: AR3.2@29.31,66.32 29.94,66.32 v1@30.55,65.71 ; v1(33.77,89.675) R27.2@33.77,90.895 ; R27.2@33.77,90.983 R27.2@33.77,90.895 ; R28.2@33.897,84.277 v1(33.897,85.61) ; AR6.1@34.712,97.362 v1(34.712,99.194) ; AR6.1@34.734,97.23 AR6.1@34.62,97.344 34.62,91.745 R27.2@33.77,90.895 ; C26.2@222.504,61.214 223.85,61.214 U6.1@223.914,61.278 223.914,64.91 224.028,65.024 v1(225.552,66.548)
  Component Side w1.27: LDO1.2@46.92,58.2 LDO1.4@46.92,64.62
  Signal Layer 2 w0.5: v1@50.292,65.278 58.05,57.52 134.28,57.52 v4@135.33,56.47 ; 94.27,93.67 95.672,95.072 v5(96.114,95.072) ; 125.99,93.65 127.392,95.052 v5(127.834,95.052) ; 159.59,93.52 160.992,94.922 v5(161.434,94.922) ; 194.03,93.69 195.432,95.092 v5(195.874,95.092)
  Signal Layer 2 w0.635: v1@30.51,65.65 v1(43.55,65.65) ; v1@34.68,99.17 49.86,99.17 56.066,92.964 69.614,92.964 70.32,93.67 94.27,93.67 197.53,93.67 ; 197.29,93.71 209.36,93.71 v1@223.75,79.32 ; v1(223.786,79.236) 223.786,68.314 v1(225.552,66.548) 227.508,66.548 J1.43@232.43,71.47 ; J1.43@232.41,71.43 234.88,68.96 234.88,56.22 J1.18@237.5,53.6
  Signal Layer 2 w1: v1@46.42,86.75 46.42,83.5 50.26,79.66 v1(50.26,65.25) ; v1@50.292,65.278 50.598,65.278 60.21,74.89 ; 60.338,74.932 65.44,80.034 65.44,88.82 69.584,92.964
  Bottom Layer w0.635: v1@33.77,85.508 v1(33.77,89.675) ; v1(223.786,79.236) R21.1@226.568,79.236 ; v1(227.088,81.776) R20.1@228.346,81.776 ; v1(227.342,83.832) R18.1@228.6,83.832 ; R18.1@228.6,83.82 229.362,83.82 229.858,84.316 R19.1@230.378,84.316 ; J1.43@232.311,71.529 J1.43@232.41,71.628
  other v1: 41.88,60.49 45.11,61.35 48.62,61.43 51.47,62.82 43.57,64.01 52.83,65.12 41.81,65.66 30.55,65.69
  other v4: 135.28,56.26
+5VA: C9_C.2 C10_C.2 C38.1 D3_C.2 D4_C.1 D11.2 L3.2 pad.3@112.88,43.78 pad.7@119.4,40.95 pad.7@119.4,42.7 R26.1 | length 119.6
  Component Side w0.3: v1(104.14,30.226) v4@127.12,30.226
  Component Side w1.27: pad.3@112.88,43.78 112.88,41.82 113.8,40.9 119.05,40.9 pad.7@119.25,41.1
  Bottom Layer w0.3: D11.2@24.67,26.924 27.972,30.226 v1(104.14,30.226)
  Bottom Layer w0.5: R26.1@126.01,26.78 126.01,29.11 127.28,30.38 L3.2@130.15,30.38
  other v1: 124.868,42.672 126.646,42.672 128.424,42.672 129.948,42.672 121.3,42.9 129.948,44.196 120.3,44.7 129.948,45.72 120.3,46.4 129.948,47.244 120.3,48.2 129.948,48.768
  other v4: 127.28,30.37
+5VA_FILTERED: J1.26 J1.27 J1.58 J1.59 L7.1 | length 10.2
  Component Side w2: J1.58@232.41,33.33 J1.59@232.41,30.79 J1.27@237.49,30.79 J1.26@237.49,33.33
+5VARTN: C9_C.1 C10_C.1 C35.2 C36.2 C37.2 C38.2 C47.2 D4_C.2 L7.3 pad.5@133.2,43.78 pad.7@109.1,41 pad.7@109.1,42.7 R30.2 T1_C.9 T1_C.10 | length 78.8
  Bottom Layer w0.3: R30.2@31.484,24.384 110.236,24.384
  other v1: 108.3,45.3 108.3,46.9 108.3,48.5 108.3,50 108.3,51.6 108.3,53.2
+5VB: C9_A.2 C10_A.2 C30.2 D3_A.2 D4_A.1 D13.2 L1.2 pad.3@146.38,43.7 pad.7@153.1,41.9 pad.7@153.2,40.2 R24.2 | length 148.5
  Component Side w0.3: D13.2@24.67,39.624 66.04,39.624 73.66,32.004 v1(74.422,32.004) ; v1(105.9,29.1) 139.556,29.1 v1(139.7,28.956)
  Component Side w0.5: L1.2@165.65,36.78 R24.2@167.78,38.91
  Bottom Layer w0.3: v1(74.422,32.004) 74.498,32.08 103.679,32.08 105.9,29.859 v1(105.9,29.1) ; v1(139.7,28.956) 147.816,28.956 152.5,33.64 v1(152.5,35.3)
  Bottom Layer w1.27: v1(146.1,42.9) 146.1,41.2 147,40.3 pad.7@153.2,40.2
  other v1: 158.82,42.404 160.598,42.404 162.376,42.404 163.9,42.404 154.252,42.632 163.9,43.928 154.252,44.432 163.9,45.452 154.252,46.132 163.9,46.976 154.252,47.932 163.9,48.5
+5VB_FILTERED: J1.20 J1.21 J1.52 J1.53 L5.4 | length 10.2
  Bottom Layer w2: J1.53@232.41,46.03 J1.52@232.41,48.57 J1.20@237.49,48.57 J1.21@237.49,46.03
+5VBRTN: C9_A.1 C10_A.1 C27.1 C28.1 C29.1 C30.1 C45.2 D4_A.2 L5.2 pad.5@166.7,43.7 pad.7@142.6,40.3 pad.7@142.6,42 R33.2 T1_A.9 T1_A.10 | length 132.7
  Component Side w0.3: R33.2@29.96,35.56 24.892,35.56 23.114,33.782 23.114,30.226 24.638,28.702 39.116,28.702 v1(40.386,27.432) ; v1(105.664,27.432) 143.51,27.432
  Bottom Layer w0.3: v1(40.386,27.432) v1(105.664,27.432)
  other v1: 168.9,42.8 168.9,44.6 142,45 142,46.6 142,48.2 142,49.8 142,51.4 142,53
+5VGNDA: J1.28 J1.29 J1.60 J1.61 L7.2 | length 10.2
  Component Side w2: J1.61@232.41,25.71 J1.60@232.41,28.25 J1.28@237.49,28.25 J1.29@237.49,25.71
+5VGNDB: J1.22 J1.23 J1.54 J1.55 L5.3 | length 10.2
  Bottom Layer w2: J1.55@232.41,40.95 J1.54@232.41,43.49 J1.22@237.49,43.49 J1.23@237.49,40.95
+5VRAW: F1.1 J1.2 J1.34 | length 178.4
  Bottom Layer w1.27: F1.1@63.314,104.394 66.845,100.863 225.837,100.863 J1.34@232.41,94.29 J1.2@237.49,94.29
-5VA: C9_D.1 C10_D.1 C44.1 D4_D.2 L4.2 pad.5@101.62,43.7 pad.7@77.3,40.1 pad.7@77.3,41.8 R31.2 R32.2 T1_D.9 T1_D.10 | length 45.5
  Component Side w0.3: R32.2@30.976,30.48 76.454,30.48
  other v1: 103.8,42.5 103.8,44 76.7,45.2 76.7,46.8 76.7,48.4 76.7,50 76.7,51.6 76.7,53.2
-5VA_FILTERED: J1.31 J1.63 L8.3 | length 17.6
  Component Side w2: L8.3@226.05,18.46 230.54,18.46 232.41,20.33 J1.63@232.41,20.63 J1.31@237.49,20.63
  Bottom Layer w2: J1.63@232.41,20.63 J1.31@237.49,20.63
-5VARTN: C9_D.2 C10_D.2 C41.2 C42.2 C43.2 C44.2 C46.2 D3_D.2 D4_D.1 D12.2 L8.1 pad.3@81.3,43.7 pad.7@87.7,40.3 pad.7@87.7,42 | length 73.7
  Bottom Layer w0.3: D12.2@24.67,33.274 v1(89.3,33.274)
  Bottom Layer w1.27: v1(80.8,43) 80.8,41.2 81.65,40.35 pad.7@87.7,40.3
  other v1: 93.368,42.772 95.146,42.772 96.924,42.772 98.448,42.772 88.7,43.4 98.448,44.296 88.7,45.2 98.448,45.82 88.7,46.9 98.448,47.344 88.7,48.7 98.448,48.868
-5VB: C9_B.1 C10_B.1 C34.2 D4_B.2 L2.2 pad.5@201.2,43.9 pad.7@177,40.7 pad.7@177,42.4 R25.1 R34.2 T1_B.9 T1_B.10 | length 155.8
  Component Side w0.3: R34.2@33.516,43.18 R34.2@33.262,43.434 54.61,43.434 68.586,57.41 172.1,57.41 v1@176.28,53.23
  Bottom Layer w0.5: R25.1@173.55,32.99 175.28,34.72 L2.2@177.73,34.72
  other v1: 176.5,45.2 176.5,46.8 176.5,48.4 176.5,50 176.5,51.6 176.5,53.2
-5VB_FILTERED: J1.25 J1.57 L6.2 | length 15.6
  Component Side w2: J1.57@232.41,35.87 J1.25@237.49,35.87
  Bottom Layer w2: L6.2@226.97,35.73 J1.25@237.46,35.73
-5VBRTN: C9_B.2 C10_B.2 C31.1 C32.1 C33.1 C34.1 D3_B.2 D4_B.1 D14.2 L6.4 pad.3@180.88,43.9 pad.7@187.4,40.7 pad.7@187.4,42.4 | length 186
  Component Side w0.3: D14.2@24.67,45.974 26.194,44.45 53.594,44.45 67.054,57.91 181.66,57.91 185.37,54.2 185.37,46.88 C10_B.2@186.675,45.575
  Component Side w1.27: pad.3@181.08,43.28 181.08,41.32 181.6,40.8 pad.7@187.3,40.8
  other v1: 189.6,42.7 193.32,42.704 195.098,42.704 196.876,42.704 198.4,42.704 198.4,44.228 188.752,44.732 198.4,45.752 188.752,46.432 198.4,47.276 188.752,48.232 198.4,48.8
-5VGNDA: J1.30 J1.62 L8.4 | length 17.2
  Component Side w2: L8.4@225.88,21.84 230.16,21.84 231.49,23.17 J1.62@232.41,23.17 J1.30@237.49,23.17
  Bottom Layer w2: J1.62@232.41,23.17 J1.30@237.49,23.17
-5VGNDB: J1.24 J1.56 L6.1 | length 15.7
  Component Side w2: J1.56@232.41,38.41 J1.24@237.49,38.41
  Bottom Layer w2: L6.1@226.9,38.41 J1.24@237.49,38.41
A0: R1_D.2 U2_D.1 U3.19 | length 52.6
  Component Side w0.3: U3.19@51.21,86.41 52.43,86.41 52.498,86.478 v3(52.884,86.478) ; R1_D.2@92.584,95.314 92.904,94.994 U2_D.1@93.532,94.994 v6@93.532,96.714
  Bottom Layer w0.3: v3@52.88,86.41 54.08,87.61 54.08,92.379 58.991,97.29 92.956,97.29 v6(93.472,96.774)
A1: R1_A.2 U2_A.1 U3.23 | length 117.6
  Component Side w0.3: U3.23@51.438,89.518 v3(52.854,89.518) ; R1_A.2@157.904,95.164 158.224,94.844 U2_A.1@158.852,94.844 v6@158.852,96.564
  Bottom Layer w0.3: v3@52.88,89.52 52.88,92.99 57.93,98.04 106.57,98.04 108.91,95.7 125.67,95.7 127.283,97.313 158.103,97.313 v6(158.792,96.624)
A2: R1_C.2 U2_C.1 U3.24 | length 81.8
  Component Side w0.3: U3.24@51.444,90.384 v3(51.444,91.148) ; R1_C.2@124.304,95.294 124.624,94.974 U2_C.1@125.252,94.974 v6@125.252,96.694
  Bottom Layer w0.3: v3@51.43,91.15 51.43,92.247 57.743,98.56 ; 57.75,98.56 92.393,98.56 92.413,98.54 123.406,98.54 v6(125.192,96.754)
A3: R1_B.2 U2_B.1 U3.25 | length 149.9
  Component Side w0.3: U3.25@49.83,92.314 v3(50.584,93.068) ; R1_B.2@192.344,95.334 192.664,95.014 U2_B.1@193.292,95.014 v6@193.292,96.734
  Bottom Layer w0.3: v3@50.63,93.09 56.6,99.06 191.03,99.06 192.49,97.6 ; 192.446,97.58 v6(193.232,96.794)
A_NTC: NTC1.2 R29.1 U3.26 | length 127
  Component Side w0.3: U3.26@49.04,91.77 49.04,93.86 49.66,94.48 52.95,94.48 56.752,90.678 70.866,90.678 72.898,88.646 72.898,60.702 v1@72.99,60.61 ; v1(73.66,55.88) 74.422,55.118 R29.1@137.672,55.118 ; NTC1.2@137.89,53.88 R29.1@137.89,55.01
  Bottom Layer w0.3: v1(72.898,60.452) 72.898,56.642 v1(73.66,55.88)
ADRS0: J1.10 R21.2 U3.9 | length 224.3
  Component Side w0.3: v3@44.24,81.67 U3.9@44.24,83.34
  Bottom Layer w0.3: v3@44.08,81.6 44.08,76.912 58.367,62.625 79.026,62.625 79.47,62.181 79.47,62.126 84.337,57.259 210.857,57.259 218.741,65.143 218.741,75.231 221.488,77.978 227.33,77.978 230.124,75.184 236.728,75.184 J1.10@237.744,74.168
  other v3: 44.06,81.66
ADRS1: J1.9 R20.2 U3.10 | length 223.6
  Component Side w0.3: v3@45.04,81.68 U3.10@45.04,83.34
  Bottom Layer w0.3: v3@44.86,81.63 44.86,76.839 58.574,63.125 79.233,63.125 79.97,62.388 79.97,62.333 84.544,57.759 210.65,57.759 218.241,65.35 218.241,75.438 223.067,80.264 233.426,80.264 J1.9@237.236,76.454
  other v3: 44.92,81.61
ADRS2: J1.8 R19.2 U3.11 | length 223.7
  Component Side w0.3: v3@45.84,81.64 U3.11@45.84,83.34
  Bottom Layer w0.3: v3@45.7,81.54 45.7,76.706 58.781,63.625 79.44,63.625 80.47,62.595 80.47,62.54 84.751,58.259 210.443,58.259 217.741,65.557 217.741,75.645 224.9,82.804 233.68,82.804 J1.8@237.49,78.994
  other v3: 45.76,81.51